# Altium PCB radxa_nx5_io_board_v1.4.PcbDoc (part 2 of 6)
Units mil, origin at the board's own origin, x right, y up, seen from the top; angles counter-clockwise.
Board outline 3937.73 x 3112.19 mil, 6 copper layers (Top, GND02, 内层3, Power4, 内层 5, Bottom), stack 58.1 mil thick; 363 components, 344 nets, 1618 pads, 1594 vias.
Unrouted connection lines stored in the file: 899.
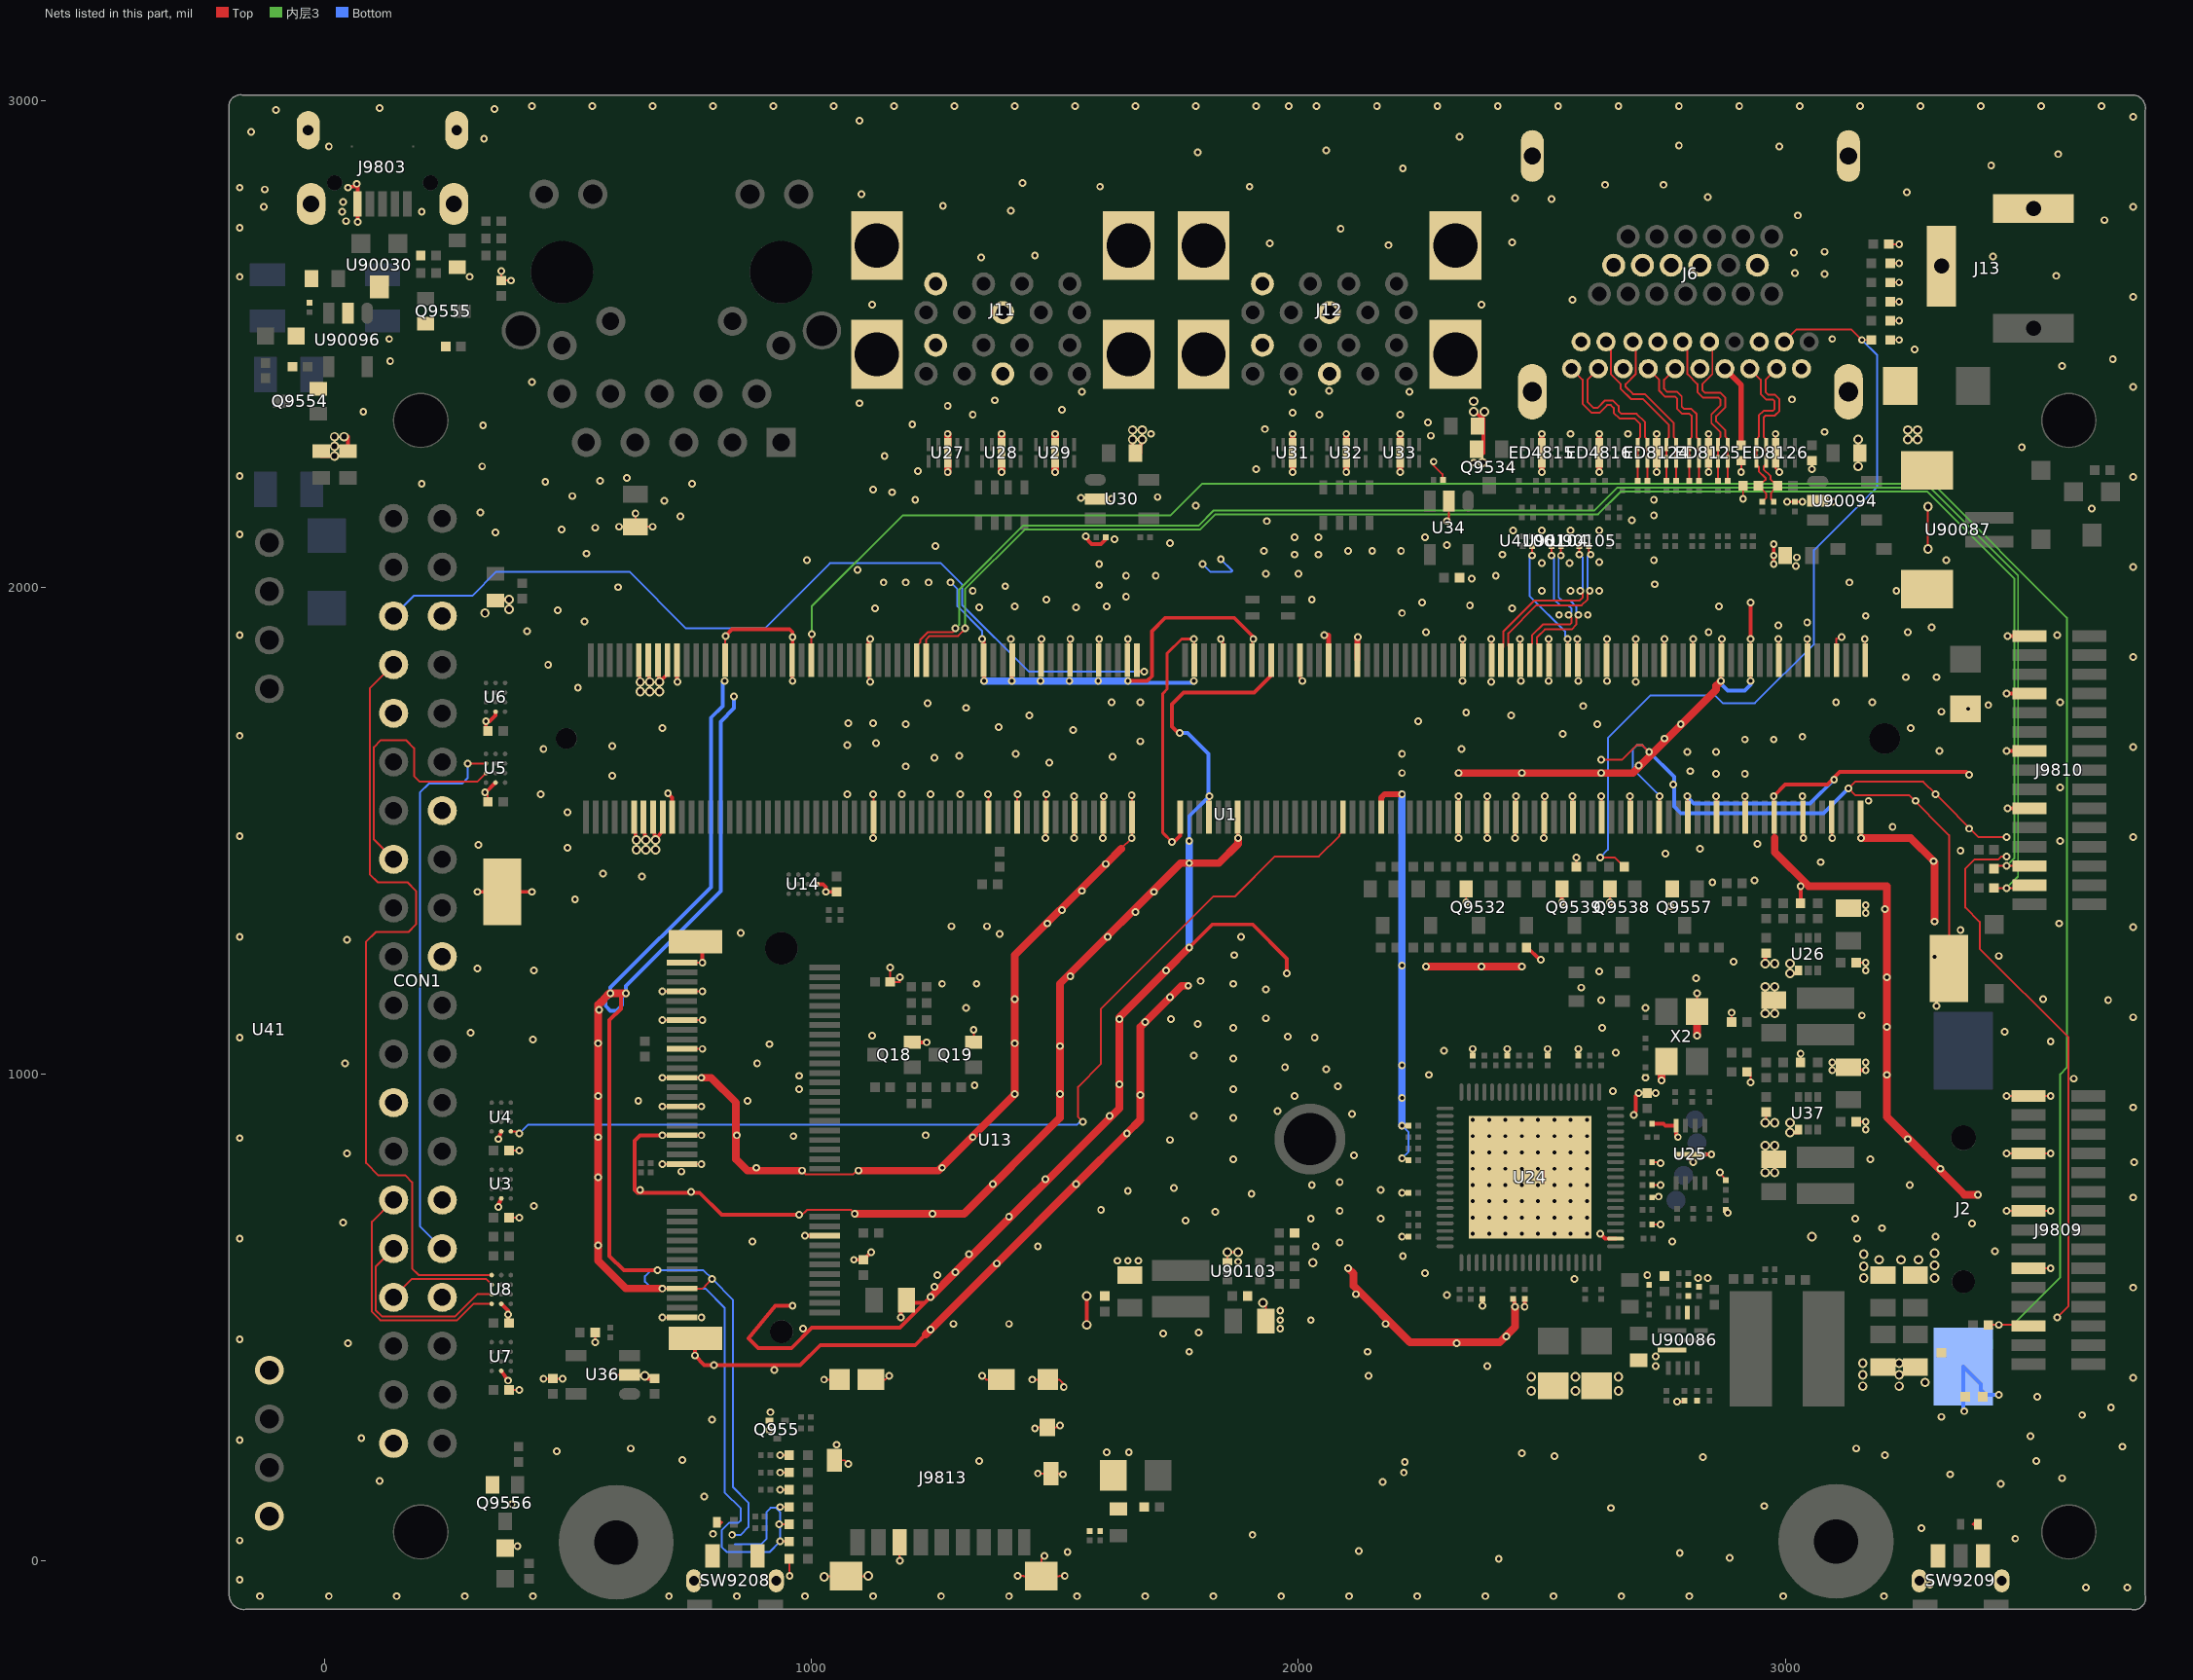
[diagram p5: the nets of this part, all layers, seen from the top]

## Via types
v1: diameter 15.75, hole 7.87, Top to Bottom, 1425 vias
v2: diameter 19.68, hole 11.81, Top to Bottom, 169 vias

## Nets (pads, with @x,y where several pads share a name; then routed paths per layer and width w, separated by ;. In a path a pad name is that pad's centre, name@x,y a point inside that pad or via, vN(x,y) a via of type N, cw(c..) or ccw(c..) an arc to the next point about the centre after c; other vN are vias at no path point) (continued)
BT_WAKE_HOST_H: J9810.3 R5.1 U1.189 | length 3202.5
  Top w3.94: U1.189@1235.24,1850.39 1235.24,1892.72 1242.13,1899.61 1301.04,1899.61 1315.88,1914.44 v1(1314.96,1915.35) ; R5.1@3429.13,1421.26 3429.13,1427.17 v1(3454.72,1427.17) J9810.3@3501.97,1427.17
  内层3 w3.94: v1(1314.96,1915.35) 1314.96,1995.87 1437.21,2118.11 1797.79,2118.11 1829.29,2149.61 2615.71,2149.61 2662.96,2196.85 3291.34,2196.85 3470.47,2017.72 3470.47,1442.91 v1(3454.72,1427.17)
CC_INT0_L: J9810.2 R6.1 U1.191 | length 3274.5
  Top w3.94: U1.191@1215.55,1850.39 1215.55,1878.94 1222.85,1886.23 1222.85,1891.46 1238.86,1907.48 1289.37,1907.48 1295.28,1913.39 v1(1295.28,1915.35) ; R6.1@3429.13,1381.89 v1(3454.72,1381.89) 3474.41,1381.89 3480.31,1387.8 J9810.2@3501.97,1387.8
  内层3 w3.94: v1(1295.28,1915.35) 1303.15,1923.23 1303.15,1995.19 1433.94,2125.98 1794.53,2125.98 1826.03,2157.48 2608.29,2157.48 2655.54,2204.72 3297.24,2204.72 3478.35,2023.62 3478.35,1405.51 v1(3454.72,1381.89)
CHRG_OK_H: CON1.5 U1.145 | length 1835
  Top w3.94: U1.145@1668.31,1850.39 1668.31,1832.68 1674.21,1826.77 v1(1683.07,1826.77)
  Bottom w3.94: CON1.5@140.94,1940.94 182.28,1982.28 302.47,1982.28 351.69,2031.5 625.98,2031.5 742.13,1915.35 903.54,1915.35 1037.4,2049.21 1265.55,2049.21 1309.06,2005.71 1309.06,1963.47 1445.76,1826.77 v1(1683.07,1826.77)
DDI0_HPD: ED8127.1 J6.D18 R95116.2 | length 1715.5
  Top w3.94: v1(2620.08,1444.88) 2649.61,1444.88 R95116.2@2669.29,1425.2 ; J6.D18@2998.03,2503.94 3023.62,2529.53 3135.83,2529.53 v1(3157.48,2507.87) ED8127.1@3177.21,2507.87
  Bottom w3.94: v1(2620.08,1444.88) 2635.83,1460.63 2635.83,1689.99 2723.4,1777.56 2855.71,1777.56 2871.45,1761.81 2937.6,1761.81 3059.06,1883.26 3059.06,2076.04 3188.98,2205.96 3188.98,2476.38 v1(3157.48,2507.87)
DDI_AUX_C_DN: C90486.1 ED8126.2 ED8126.9 J6.D17 R95120.2 | length 352.1
  Top w3.94: C90486.1@2976.38,2175.2 2970.47,2181.1 2970.47,2192.91 R95120.2@2984.25,2208.66 2982.28,2208.66 2969.49,2221.46 2969.49,2228.49 2955.71,2242.27 2955.71,2248.03 2960.63,2252.95 ED8126.2@2960.63,2258.37 ED8126.9@2960.63,2292.82 2960.63,2304.13 2955.71,2309.06 2955.71,2348.43 2959.65,2352.36 2978.35,2352.36 2988.19,2362.2 2988.19,2368.11 2988.19,2385.97 2978.49,2395.67 2964.57,2395.67 2959.65,2400.59 2959.65,2426.18 J6.D17@2982.28,2448.82
DDI_AUX_C_DP: C90485.1 ED8126.1 ED8126.10 J6.D15 R95119.2 | length 354.8
  Top w3.94: J6.D15@2927.17,2448.82 2949.8,2426.18 2949.8,2396.51 2960.49,2385.83 2974.41,2385.83 2978.35,2381.89 2978.35,2366.28 2974.4,2362.33 2955.7,2362.33 2945.87,2352.5 2945.87,2309.06 2940.94,2304.13 ED8126.10@2940.94,2292.82 ED8126.1@2940.94,2258.37 2940.94,2251.97 2945.87,2247.05 2945.87,2238.19 2959.65,2224.41 2959.65,2220.47 2947.83,2208.66 R95119.2@2944.88,2208.66 2960.63,2192.91 2960.63,2183.07 C90485.1@2952.76,2175.2
DDI_TX0_C_DN: C90479.2 ED8124.2 ED8124.9 J6.D3 | length 354.3
  Top w3.94: J6.D3@2616.14,2448.82 2593.5,2426.18 2593.5,2381.05 2606.44,2368.11 2614.17,2368.11 2629.92,2383.86 2645.67,2383.86 2657.48,2372.05 2657.48,2362.34 2663.53,2356.3 2694.88,2356.3 2711.61,2339.57 2711.61,2309.06 2716.54,2304.13 ED8124.9@2716.54,2292.82 ED8124.2@2716.54,2258.37 C90479.2@2716.54,2218.5
DDI_TX0_C_DP: C300.2 ED8124.1 ED8124.10 J6.D1 | length 354.3
  Top w3.94: J6.D1@2561.02,2448.82 2583.66,2426.18 2583.66,2376.97 2602.36,2358.27 2618.25,2358.27 2634,2374.02 2641.59,2374.02 2647.64,2367.97 2647.64,2358.27 2659.45,2346.46 2690.81,2346.46 2701.77,2335.49 2701.77,2308.07 2696.85,2303.15 ED8124.10@2696.85,2292.82 ED8124.1@2696.85,2258.37 C300.2@2696.85,2218.5
DDI_TX1_C_DN: C90477.2 ED8124.5 ED8124.6 J6.D6 | length 353.7
  Top w3.94: J6.D6@2687.01,2503.94 2692.91,2498.03 2692.91,2437.99 2672.24,2417.32 2672.24,2411.42 2687.01,2396.65 2711.75,2396.65 2770.67,2337.74 2770.67,2309.06 2775.59,2304.13 ED8124.6@2775.59,2292.82 ED8124.5@2775.59,2258.37 C90477.2@2775.59,2218.5
DDI_TX1_C_DP: C90478.2 ED8124.4 ED8124.7 J6.D4 | length 355.4
  Top w3.94: J6.D4@2631.89,2503.94 2641.73,2494.09 2641.73,2437.68 2662.4,2417.01 2662.4,2407.34 2682.93,2386.81 2707.68,2386.81 2760.83,2333.66 2760.83,2308.07 2755.91,2303.15 ED8124.7@2755.91,2292.82 ED8124.4@2755.91,2258.37 C90478.2@2755.91,2218.5
DDI_TX2_C_DN: C90527.2 ED8125.2 ED8125.9 J6.D9 | length 290.3
  Top w3.94: J6.D9@2773.62,2448.82 2750.98,2426.18 2750.98,2407.48 2756.89,2401.57 2777.56,2401.57 2787.4,2391.73 2787.4,2371.06 2792.32,2366.14 2807.23,2366.14 2817.91,2355.45 2817.91,2308.07 2822.83,2303.15 ED8125.9@2822.83,2292.82 ED8125.2@2822.83,2258.37 C90527.2@2822.83,2218.5
DDI_TX2_C_DP: C90476.2 ED8125.1 ED8125.10 J6.D7 | length 290.3
  Top w3.94: J6.D7@2718.5,2448.82 2741.14,2426.18 2741.14,2403.4 2752.81,2391.73 2773.48,2391.73 2777.56,2387.66 2777.56,2366.99 2788.25,2356.3 2803.15,2356.3 2808.07,2351.38 2808.07,2309.06 2803.15,2304.13 ED8125.10@2803.15,2292.82 ED8125.1@2803.15,2258.37 C90476.2@2803.15,2218.5
DDI_TX3_C_DN: C90473.2 ED8125.5 ED8125.6 J6.D12 | length 352.1
  Top w3.94: J6.D12@2844.49,2503.94 2850.39,2498.03 2850.39,2437.99 2829.72,2417.32 2829.72,2404.53 2834.65,2399.61 2866.28,2399.61 2876.97,2388.92 2876.97,2379.92 2876.97,2369.94 2858.27,2351.24 2858.27,2340.69 2876.97,2321.99 2876.97,2309.06 2881.89,2304.13 ED8125.6@2881.89,2292.82 ED8125.5@2881.89,2258.37 C90473.2@2881.89,2218.5
DDI_TX3_C_DP: C90526.2 ED8125.4 ED8125.7 J6.D10 | length 353.7
  Top w3.94: J6.D10@2789.37,2503.94 2799.21,2494.09 2799.21,2437.68 2819.88,2417.01 2819.88,2400.45 2830.57,2389.76 2862.2,2389.76 2867.13,2384.84 2867.13,2374.02 2848.43,2355.32 2848.43,2336.61 2867.13,2317.91 2867.13,2309.06 2862.2,2304.13 ED8125.7@2862.2,2292.82 ED8125.4@2862.2,2258.37 C90526.2@2862.2,2218.5
DP_MODE: J6.D13 R500.1 | length 171.3
  Top w11.81: J6.D13@2875.98,2448.82 2909.45,2415.35 R500.1@2909.45,2291.34
GAUGE_ALRT: J9809.3 R133.1 U1.213 | length 4519.6
  Top w3.94: U1.213@999.02,1850.39 999.02,1900.59 1000,1901.57 v1(1000,1903.54) ; R133.1@3417.32,484.25 v1(3438.98,484.25) 3500,484.25 J9809.3@3500,482.28
  内层3 w3.94: v1(1000,1903.54) 1000,1960.43 1187.21,2147.64 1737.51,2147.64 1802.47,2212.6 3303.15,2212.6 3578.74,1937.01 3578.74,1013.1 3564.96,999.32 3564.96,582 3467.21,484.25 v1(3438.98,484.25)
GND: C2.1 C3.1 C4.1 C5.1 C6.1 C7.2 C8.2 C9.2 C10.1 C53.1 C56.2 C57.2 C58.2 C63.1 C76.2 C81.2 C82.2 C83.2 C84.2 C85.2 C86.2 C87.2 C88.2 C89.2 C90.2 C91.2 C92.2 C93.2 C94.2 C95.2 C96.2 C97.2 C98.2 C99.2 C100.2 C101.2 C102.2 C103.2 C105.2 C106.2 C107.2 C108.2 C117.2 C118.2 C120.2 C121.2 C122.2 C123.2 C124.2 C90194.2 C90195.2 C90414.2 C90415.2 C90418.1 C90419.1 C90422.2 C90424.2 C90425.2 C90426.2 C90427.2 C90428.2 C90469.2 C90474.2 C90475.2 C90482.2 C90483.2 C90484.2 C90495.2 C90496.2 C90521.2 C90522.2 C90524.2 C90528.2 C90530.2 C90531.2 C90532.2 C90533.2 CON1.6 CON1.9 CON1.14 CON1.20 CON1.25 CON1.30 CON1.34 CON1.39 D6.2 D7.2 D8.2 D9.2 D10.2 D11.2 D12.2 D90007.1 ED4807.2 ED4815.3 ED4815.8 ED4816.3 ED4816.8 ED4817.2 ED4818.2 ED4819.2 ED4820.2 ED8124.3 ED8124.8 ED8125.3 ED8125.8 ED8126.3 ED8126.8 ED8127.2 ED8128.2 J2.2 J6.1 J6.2 J6.3 J6.4 J6.D2 J6.D5 J6.D8 J6.D11 J6.D16 J6.D19 J6.H2 J6.H5 J6.H8 J6.H11 J6.H17 J11.4 J11.7 J11.10 J11.11 J11.15 J11.18 J11.21 J11.22 J12.4 J12.7 J12.10 J12.11 J12.15 J12.18 J12.21 J12.22 J13.2 J13.3 J9803.5 J9803.6 J9803.7 J9803.8 J9803.9 J9809.6 J9809.9 J9809.12 J9809.15 J9810.6 J9810.9 J9810.12 J9810.15 J9813.6 J9813.10 J9813.11 J9813.12 J9813.13 J9813.14 J9813.15 J9813.16 J9813.17 J9813.D2 LED705.2 LED706.2 Q18.2 Q19.2 Q955.2 Q9532.2 Q9534.2 Q9538.2 Q9539.2 Q9554.2 Q9555.2 Q9556.2 Q9557.2 R78.1 R103.2 R112.2 R114.2 R116.2 R125.2 R127.2 R500.2 R95054.1 R95055.2 R95058.2 R95060.2 R95110.1 R95115.1 R95119.1 R95121.2 R95171.1 R95188.2 R95192.2 R95195.2 R95197.1 R95200.2 SW9208.1 SW9208.3 SW9208.4 SW9208.5 SW9209.1 SW9209.3 SW9209.4 SW9209.5 U1.1 U1.2 U1.7 U1.8 U1.13 U1.14 U1.19 U1.20 U1.25 U1.26 U1.31 U1.32 U1.37 U1.38 U1.43 U1.44 U1.49 U1.50 U1.55 U1.56 U1.61 U1.62 U1.67 U1.68 U1.73 U1.74 U1.79 U1.80 U1.85 U1.86 U1.102 U1.107 U1.113 U1.119 U1.125 U1.129 U1.132 U1.135 U1.138 U1.141 U1.144 U1.146 U1.147 U1.152 U1.153 U1.158 U1.159 U1.164 U1.165 U1.170 U1.171 U1.176 U1.177 U1.200 U1.201 U1.217 U1.231 U1.241 U1.242 U1.243 U1.244 U1.245 U1.246 U1.247 U1.248 U1.249 U1.250 U1.H3 U1.H4 U3.D2 U4.D2 U5.D2 U6.D2 U7.D2 U8.D2 U13.1 U13.7 U13.18 U13.33 U13.39 U13.45 U13.51 U13.57 U13.63 U13.69 U13.75 U13.76 U13.77 U14.D2 U24.40 U24.77 U25.4 U25.9 U26.1 U27.3 U27.8 U28.3 U28.8 U29.3 U29.8 U30.2 U31.3 U31.8 U32.3 U32.8 U33.3 U33.8 U34.2 U36.2 U37.1 U41.5 U41.8 U90030.3 U90086.2 U90086.10 U90087.3 U90087.4 U90094.2 U90096.2 U90103.1 X2.2 X2.4 | length 31064.2
  Top w3.94: v1@329.72,1577.76 334.65,1572.83 C4.1@334.65,1559.06 ; v1(362.2,2649.61) R78.1@362.2,2629.92 v1(381.89,2629.92) ; C6.1@377.95,350.39 v1(399.61,350.39) ; C2.1@377.95,704.72 v1(399.61,704.72) ; C3.1@377.95,842.52 v1(399.61,842.52) ; v1(448.82,374.02) C123.2@468.5,374.02 v1(488.19,374.02) ; v1(555.12,448.82) C124.2@555.12,468.5 ; v2(592.52,379.92) 594.49,381.89 U36.2@625.98,381.89 655.51,381.89 v2(657.48,379.92) ; v1(637.8,2151.57) C63.1@637.8,2124.02 v1(673.23,2124.02) ; v1(692.91,500) U13.1@733.27,500 ; v1(692.91,559.06) U13.7@733.27,559.06 773.62,559.06 774.53,558.15 781.23,564.24 781.3,564.96 789.37,573.03 789.37,573.37 v1(795.28,578.74) ; v1(692.91,814.96) U13.33@733.27,814.96 v1(773.62,814.96) ; v1(692.91,874.02) U13.39@733.27,874.02 v1(773.62,874.02) ; v1(692.91,933.07) U13.45@733.27,933.07 v1(773.62,933.07) ; v1(692.91,992.13) U13.51@733.27,992.13 v1(773.62,992.13) ; v1(692.91,1110.24) U13.63@733.27,1110.24 v1(775.59,1110.24) ; v1(692.91,1169.29) U13.69@733.27,1169.29 v1(775.59,1169.29) ; U13.57@733.27,1051.18 v1(775.59,1051.18) ; U13.75@733.27,1228.35 v1(775.59,1228.35) ; U1.231@821.85,1850.39 821.85,1904.53 v1(822.83,1899.61) ; Q955.2@913.19,287.4 913.19,278.53 913.39,278.33 v1(913.39,267.72) ; v1(933.07,74.8) D9.2@953.59,74.8 ; v1(935.04,39.37) D8.2@953.59,39.37 ; v1(935.04,110.24) D10.2@953.59,110.24 ; v1(935.04,145.67) D11.2@953.59,145.67 ; v1(935.04,181.1) D12.2@953.59,181.1 ; v1(935.04,216.54) D6.2@953.59,216.54 ; D7.2@953.59,3.94 v1(954.72,-31.5) ; v1(974.41,710.63) 977.36,707.68 990.16,720.47 1080.71,720.47 v1(1088.58,712.6) ; v1(980.32,801.18) 988.19,793.31 1084.65,793.31 1094.49,803.15 v1(1096.46,801.18) ; v2(1025.59,-33.46) 1027.09,-31.97 J9813.16@1070.37,-31.97 1106.81,-31.97 1107.28,-31.5 v2(1116.14,-31.5) ; v1(1025.59,372.05) J9813.14@1057.09,372.05 ; J9813.15@1046.75,206.2 1067.42,206.2 v1(1074.8,198.82) ; U1.201@1117.13,1850.39 1117.13,1808.07 v1(1120.08,1805.12) ; J9813.13@1121.56,372.05 1151.57,372.05 v1(1159.45,379.92) ; v1(1125.98,1484.25) 1126.97,1485.24 U1.200@1126.97,1527.56 1126.97,1573.82 v1(1125.98,1574.8) ; v1(1161.42,1218.5) 1159.52,1218.13 1161.42,1208.66 C57.2@1161.42,1188.98 1181.1,1188.98 v1(1181.1,1198.82) ; J9813.6@1180.61,37.7 1180.61,8.15 1181.1,7.66 v1(1181.1,0) ; Q19.2@1332.68,1064.96 v1(1332.68,1090.55) ; v1(1350.39,379.92) 1358.27,372.05 J9813.12@1389.27,372.05 ; v1(1362.2,1574.8) 1362.2,1570.87 1363.19,1569.88 U1.176@1363.19,1527.56 ; U1.170@1422.24,1527.56 1422.24,1573.82 v1(1423.23,1574.8) ; v1(1423.23,-31.5) 1435.04,-31.5 1435.52,-31.97 J9813.17@1471.95,-31.97 ; v1(1452.76,372.05) J9813.11@1485.24,372.05 1508.37,372.05 1517.72,362.7 v1(1517.72,356.3) ; v1(1458.66,271.65) 1460.63,273.62 J9813.D2@1484.25,273.62 1505.91,273.62 v1(1509.84,277.56) ; v1(1464.57,179.13) 1472.92,179.13 1473.41,178.64 J9813.10@1491.63,178.64 1514.27,178.64 v1(1515.75,177.17) ; U1.165@1471.46,1850.39 1471.46,1892.72 v1(1472.44,1893.7) ; v1(1478.35,9.84) 1471.95,3.44 J9813.17@1471.95,-31.97 ; v1(1480.32,1484.25) 1481.3,1485.24 U1.164@1481.3,1527.56 1481.3,1573.82 v1(1482.28,1574.8) ; v1(1519.69,-31.5) 1508.85,-31.5 1508.38,-31.97 J9813.17@1471.95,-31.97 ; U1.159@1530.51,1850.39 1530.51,1892.72 v1(1531.5,1893.7) ; v1(1539.37,1484.25) 1540.35,1485.24 U1.158@1540.35,1527.56 1540.35,1569.88 v1(1539.37,1570.87) ; U1.153@1589.57,1850.39 1589.57,1892.72 v1(1590.55,1893.7) ; v1(1598.43,1484.25) 1599.41,1485.24 U1.152@1599.41,1527.56 1599.41,1569.88 v1(1600.39,1570.87) ; 1635.83,1462.6 v1(1657.48,1484.25) 1658.46,1485.24 U1.146@1658.46,1527.56 1658.46,1571.85 v1(1657.48,1572.83) ; U1.147@1648.62,1850.39 1648.62,1892.72 v1(1649.61,1893.7) ; v1(1785.43,1893.7) 1786.42,1892.72 U1.141@1786.42,1850.39 ; U1.138@1815.94,1527.56 1815.94,1569.88 v1(1816.93,1570.87) ; v1(1840.55,1893.7) 1844.49,1893.7 1845.47,1892.72 U1.135@1845.47,1850.39 ; U90103.1@1854.33,614.17 v2(1854.33,633.86) v2(1875.98,633.86) ; U1.132@1875,1527.56 1875,1485.24 v1(1875.98,1484.25) ; U1.129@1904.53,1850.39 1904.53,1892.72 1905.51,1893.7 v1(1907.48,1893.7) ; v2(1927.17,529.53) 1933.07,529.53 C90530.2@1933.07,492.13 ; U1.119@2002.95,1850.39 2002.95,1808.07 v1(2007.87,1807.09) ; v1(2212.6,665.35) C99.2@2226.38,665.35 ; v1(2212.6,755.91) C88.2@2226.38,755.91 ; v1(2212.6,826.77) 2222.44,826.77 C98.2@2226.38,822.83 ; v1(2212.6,893.7) C93.2@2226.38,893.7 ; v1(2277.56,2257.87) 2275.35,2256.22 2275.59,2255.98 2275.59,2251.97 2295.28,2232.28 2296.18,2232.28 2296.18,2227.44 2297.24,2226.38 R116.2@2297.24,2220.47 ; v1(2305.12,2135.83) 2309.06,2135.83 U34.2@2309.06,2177.17 ; v1(2328.74,1484.25) 2327.76,1485.24 U1.86@2327.76,1527.56 2328.74,1527.56 v1(2328.74,1570.87) ; v1(2336.61,1893.7) 2337.6,1892.72 U1.85@2337.6,1850.39 ; v1(2344.49,1352.36) Q9532.2@2344.49,1379.92 ; C86.2@2358.27,1037.4 v1(2358.27,1051.18) ; v1(2387.8,1484.25) 2386.81,1485.24 U1.80@2386.81,1527.56 2386.81,1569.88 v1(2387.8,1570.87) ; v1(2395.67,1893.7) 2395.67,1894.69 2396.65,1893.7 U1.79@2396.65,1850.39 ; C97.2@2429.13,1037.4 v1(2429.13,1051.18) ; v1(2444.88,1484.25) 2445.87,1485.24 U1.74@2445.87,1527.56 2445.87,1569.88 v1(2446.85,1570.87) ; v1(2454.72,1893.7) 2455.71,1892.72 U1.73@2455.71,1850.39 ; v1(2503.94,1484.25) 2504.92,1485.24 U1.68@2504.92,1527.56 2504.92,1569.88 v1(2505.91,1570.87) ; C87.2@2511.81,1037.4 v1(2511.81,1051.18) ; v1(2513.78,1893.7) 2513.78,1850.39 U1.67@2514.76,1850.39 ; v1(2562.99,1570.87) 2563.98,1569.88 U1.62@2563.98,1527.56 ; R95115.1@2570.87,1425.2 v1(2570.87,1444.88) ; v1(2572.83,1893.7) 2572.83,1850.39 U1.61@2573.82,1850.39 ; C96.2@2574.8,1037.4 v1(2574.8,1051.18) ; v1(2618.11,2236.22) 2617.13,2236.22 v1@2618.11,2237.2 ; v1@2618.11,2313.98 2617.13,2314.96 v1(2618.11,2314.96) ; v1(2622.05,1570.87) 2623.03,1569.88 U1.56@2623.03,1527.56 ; v1(2622.05,1645.67) 2665.35,1645.67 2694.88,1675.2 2706.69,1675.2 v1(2720.47,1661.42) ; U1.55@2632.87,1850.39 2632.87,1894.69 v1(2633.86,1893.7) ; v1(2639.76,1352.36) Q9538.2@2639.76,1379.92 ; v1(2681.1,1570.87) 2682.09,1569.88 U1.50@2682.09,1527.56 ; U1.49@2691.93,1850.39 2691.93,1894.69 v1(2692.91,1893.7) ; v1(2698.82,960.63) C90.2@2716.54,960.63 v1(2734.25,960.63) ; C101.2@2726.38,690.94 v1(2744.09,690.94) ; R103.2@2726.38,746.06 2724.41,748.03 v1(2740.16,748.03) ; C95.2@2726.38,771.65 v1(2744.09,771.65) ; C76.2@2726.38,818.9 2744.09,818.9 v1(2744.09,816.93) ; v1(2736.22,2236.22) ED8124.3@2736.22,2260.33 ; ED8124.8@2736.22,2290.85 v1(2736.22,2314.96) ; U1.44@2741.14,1527.56 2741.14,1569.88 v1(2742.13,1570.87) ; U1.43@2750.98,1850.39 2750.98,1893.7 v1(2751.97,1893.7) ; v1(2777.56,326.77) 2793.31,326.77 C90425.2@2793.31,328.74 ; v1(2799.21,1570.87) 2800.2,1569.88 U1.38@2800.2,1527.56 ; U1.37@2810.04,1850.39 2810.04,1893.7 2811.02,1894.69 v1(2811.02,1893.7) ; X2.4@2818.9,1127.95 v1(2818.9,1165.35) ; v1(2842.52,2236.22) ED8125.3@2842.52,2260.33 ; ED8125.8@2842.52,2290.85 v1(2842.52,2314.96) ; v1(2858.27,1570.87) 2859.25,1569.88 U1.32@2859.25,1527.56 ; v1(2866.14,797.24) C82.2@2877.95,781.5 ; v1(2868.11,1807.09) 2868.11,1850.39 U1.31@2869.09,1850.39 2869.09,1894.69 v1(2870.08,1893.7) ; C81.2@2877.95,720.47 v1(2881.89,714.57) ; C91.2@2889.76,1106.3 v1(2889.76,1125.98) ; v1(2909.45,2236.22) R500.2@2909.45,2259.84 ; v1(2913.39,2181.1) 2912.83,2181.14 2913.39,2188.98 R95119.1@2913.39,2208.66 ; v1(2917.32,1570.87) 2917.32,1571.85 2918.31,1570.87 U1.26@2918.31,1527.56 ; C92.2@2921.26,1003.94 2929.13,1003.94 v1(2929.13,982.28) ; U1.25@2928.15,1850.39 U1.25@2929.13,1850.39 ; v1(2929.13,1807.09) U1.25@2929.13,1850.39 ; v1(2929.13,1893.7) U1.25@2929.13,1850.39 ; v2(2958.66,899.61) 2960.63,901.57 C121.2@2960.63,921.26 ; v1(2976.38,1570.87) 2977.36,1569.88 U1.20@2977.36,1527.56 2977.36,1484.25 2978.35,1484.25 ; ED8126.3@2980.32,2260.33 2980.32,2244.09 v1(2988.19,2236.22) ; ED8126.8@2980.32,2290.85 2980.32,2313.98 2979.33,2314.96 v1(2980.32,2314.96) ; v1(2986.22,1893.7) 2986.22,1894.69 2987.2,1893.7 U1.19@2987.2,1850.39 ; v1(3003.94,2175.2) R95121.2@3019.69,2175.2 v1(3035.43,2175.2) ; R125.2@3031.5,1023.62 v1(3031.5,1041.34) ; U1.14@3036.42,1527.56 3036.42,1484.25 v1(3037.4,1484.25) ; v1(3045.28,1893.7) 3046.26,1892.72 U1.13@3046.26,1850.39 ; v1(3055.12,2242.13) C90482.2@3055.12,2259.84 ; U90094.2@3066.93,2177.17 3096.46,2177.17 v1(3098.43,2175.2) ; U1.8@3095.47,1527.56 3095.47,1484.25 v1(3096.46,1484.25) ; U1.7@3105.32,1850.39 3105.32,1894.69 3106.3,1893.7 v1(3116.14,1897.64) ; C118.2@3145.67,901.57 v1(3165.35,901.57) ; C103.2@3145.67,1228.35 v1(3165.35,1228.35) ; v2(3149.61,2248.03) 3149.61,2275.59 C90483.2@3153.54,2275.59 ; U1.2@3154.53,1527.56 3154.53,1485.24 v1(3155.51,1484.25) ; v1(3163.39,1893.7) 3163.39,1894.69 3164.37,1893.7 U1.1@3164.37,1850.39 ; C90469.2@3212.6,2704.72 v1(3234.25,2704.72) ; ED8127.2@3215.7,2507.87 v1(3234.25,2507.87) ; ED4820.2@3215.7,2547.24 v1(3234.25,2547.24) ; ED4819.2@3215.7,2586.61 v1(3234.25,2586.61) ; ED4817.2@3215.7,2625.98 v1(3234.25,2625.98) ; ED4818.2@3215.7,2665.35 v1(3234.25,2665.35) ; v2(3293.31,2078.74) v2(3293.31,2165.35) ; U1.H4@3336.61,1216.54 3336.61,1490.16 3253.94,1572.83 3143.7,1572.83 v1(3129.92,1586.61) 3143.7,1600.39 3283.46,1600.39 v1(3309.06,1574.8) 3397.64,1486.22 v1(3454.72,1486.22) ; v1(3454.72,718.5) J9809.9@3500,718.5 v1(3545.28,718.5) ; v1(3454.72,836.61) J9809.12@3500,836.61 3543.31,836.61 3544.29,837.6 v1(3545.28,836.61) ; v1(3454.72,954.72) J9809.15@3500,954.72 v1(3545.28,954.72) ; v1(3454.72,1446.85) 3444.14,1446.85 3438.23,1440.94 3389.29,1440.94 3370.08,1421.74 3370.08,1341.84 3399.61,1312.32 3399.61,1257.2 3582.19,1074.62 3582.19,523.13 v1(3559.06,500) ; J9809.6@3500,600.39 v1(3545.28,600.39)
  Top w5.91: v1(1740.16,1476.38) 1721.46,1495.08 1721.46,1781.5 1730.32,1790.35 1730.32,1864.07 1759.94,1893.7 v1(1785.43,1893.7)
  Top w7.87: C8.2@-7.87,2279.53 -7.87,2269.69 v2(19.69,2269.69) ; v2(39.37,2309.06) 47.24,2309.06 C7.2@47.24,2279.53 ; v1(47.24,2820.87) 49.21,2822.83 v1@66.93,2822.83 ; v1(64.96,2828.74) v1@66.93,2822.83 ; v1(312.99,1374.02) U1.H3@364.17,1374.02 v1(425.2,1374.02) ; v1(328.74,1578.74) 329.72,1577.76 U5.D2@350.39,1598.43 ; C5.1@334.65,1704.72 330.71,1704.72 v1(330.71,1724.41) 338.58,1724.41 350.39,1736.22 U6.D2@350.39,1744.09 ; C9.2@350.39,1972.44 350.39,1974.41 v2(377.95,1974.41) ; v1(356.3,726.38) 356.3,730.32 U3.D2@362.2,744.09 ; v1(356.3,866.14) U4.D2@362.2,881.89 ; U7.D2@362.2,389.76 v1(375.98,370.08) ; U8.D2@362.2,527.56 375.98,513.78 v1(375.98,505.91) 375.98,488.19 C10.1@377.95,488.19 ; v1@616.14,1165.35 608.27,1157.48 608.27,1133.86 584.65,1110.24 584.65,626.04 614.23,596.46 v1(683.07,596.46) ; U1.250@634.84,1527.56 634.84,1508.2 v2(639.76,1480.32) ; U1.249@644.69,1850.39 644.69,1849.41 v2(647.64,1805.12) ; v1(647.64,761.81) 647.64,755.91 641.73,755.91 ; U1.248@654.53,1527.56 654.53,1508.2 v2(659.45,1480.32) ; v2(657.48,379.92) 663.39,374.02 C122.2@677.17,374.02 ; U1.247@664.37,1850.39 664.37,1849.41 v2(667.32,1805.12) ; U1.246@674.21,1527.56 674.21,1508.2 v2(679.13,1480.32) 693.9,1499.62 U1.244@693.9,1527.56 ; U1.245@684.06,1850.39 684.06,1849.41 v2(687.01,1805.12) 703.74,1821.85 U1.243@703.74,1850.39 ; v1(692.91,874.02) 647.64,874.02 635.83,862.2 635.83,761.81 641.73,755.91 ; v1(704.72,1576.77) 713.58,1567.91 U1.242@713.58,1527.56 ; U1.241@723.43,1850.39 723.43,1804.13 v1(724.41,1805.12) ; v1(751.97,757.87) v1@751.97,755.91 ; U13.77@760.83,456.69 759.84,456.69 v1(759.84,421.26) 779.53,401.57 v1(799.21,401.57) 976.3,401.57 1017.63,442.91 1212.6,442.91 1234.25,464.57 ; U13.76@760.83,1271.65 775.59,1271.65 v1(775.59,1228.35) ; v1(822.83,1899.61) 836.61,1913.39 954.72,1913.39 960.63,1907.48 v1(960.63,1897.64) 960.63,1850.39 U1.217@959.65,1850.39 959.65,1808.07 v1(960.63,1807.09) ; v1(960.63,523.62) 925.2,523.62 870.08,456.69 889.76,437.01 958.66,437.01 1000,478.35 1181.1,478.35 v1(1244.09,541.34) 1232.28,529.53 1194.88,529.53 C58.2@1194.88,535.43 1183.07,535.43 v1(1183.07,500) ; v1(974.41,710.63) 814.96,710.63 769.69,755.91 ; v1(986.22,667.32) U13.18@1026.58,667.32 ; U14.D2@1011.81,1389.76 1023.62,1389.76 1029.53,1383.86 v1(1029.53,1374.02) C53.1@1051.18,1374.02 ; v1(1086.61,618.11) C56.2@1106.3,618.11 v1(1122.05,633.86) ; U1.201@1117.13,1850.39 1117.13,1890.75 v1(1120.08,1893.7) ; Q18.2@1206.69,1064.96 v1(1236.22,1064.96) ; v1(1350.39,1893.7) 1353.35,1890.75 U1.177@1353.35,1850.39 1354.33,1850.39 v1(1354.33,1807.09) ; v1(1411.42,1807.09) 1411.42,1850.39 U1.171@1412.4,1850.39 ; v1(1562.99,2104.33) 1562.99,2101.07 1575.48,2088.58 1593.81,2088.58 1605.96,2100.73 1604.33,2100.73 R114.2@1604.33,2102.36 ; v2(1564.96,484.25) v2(1564.96,543.31) ; U30.2@1582.68,2181.1 v1(1616.14,2181.1) ; v1(1649.61,1807.09) 1688.98,1807.09 1698.82,1816.93 1698.82,1909.45 1726.38,1937.01 1868.11,1937.01 1907.48,1897.64 v1(1907.48,1893.7) ; v2(1659.45,2303.15) 1659.45,2275.59 C107.2@1665.35,2275.59 1675.2,2275.59 1675.2,2289.37 v2(1679.13,2303.15) ; v1(1740.16,1476.38) 1742.13,1474.41 1756.89,1489.17 U1.144@1756.89,1527.56 ; v1(1755.91,1700.79) 1754.41,1699.3 1740.16,1713.55 1740.16,1759.84 1763.78,1783.46 1909.11,1783.46 1945.7,1820.05 1945.7,1850.39 U1.125@1943.9,1850.39 ; v1(1775.59,1259.84) 1822.83,1307.09 1906.13,1307.09 1976.38,1236.84 v1(1976.38,1206.69) ; v2(2360.24,2360.24) 2379.92,2346.46 2379.92,2275.59 Q9534.2@2370.08,2275.59 ; v1(2377.95,523.62) C100.2@2377.95,537.4 ; C89.2@2440.94,537.4 2442.91,537.4 2442.91,535.43 v1(2444.88,521.65) ; v1(2464.57,521.65) C94.2@2464.57,537.4 ; R95110.1@2468.5,1259.84 2468.5,1260.83 2469.49,1260.83 2497.05,1233.27 v1(2498.03,1234.25) ; v1(2541.34,1352.36) Q9539.2@2541.34,1379.92 ; v1(2620.08,671.26) 2629.92,661.42 U24.40@2651.57,661.42 ; v1(2688.98,915.35) 2692.22,915.16 2692.91,926.98 2692.91,954.72 v1(2698.82,960.63) ; C85.2@2726.38,897.64 2749.51,897.64 2753.44,893.7 U25.4@2775.59,893.7 2775.59,870.08 v1(2779.53,870.08) ; v1(2811.02,818.9) 2805.12,824.8 U25.9@2805.12,834.65 v1(2848.43,834.65) ; v1(2929.13,1893.7) v1(2929.13,1968.5) ; v2(2958.66,1226.38) 2958.66,1248.03 C106.2@2960.63,1248.03 ; C120.2@2976.38,824.8 2978.35,824.8 v2(2978.35,797.24) ; C105.2@2976.38,1151.57 2978.35,1151.57 v2(2978.35,1124.02) ; v1(2976.38,1570.87) 3000,1594.49 3086.61,1594.49 3112.2,1620.08 3372.05,1620.08 v1(3377.95,1614.17) ; v1(2976.38,2047.24) v1(2976.38,2064.96) v1(2976.38,2088.58) ; v2(3009.84,879.92) 3027.56,879.92 U37.1@3027.56,885.83 ; v2(3009.84,1206.69) 3027.56,1206.69 U26.1@3027.56,1212.6 ; R112.2@3031.5,1350.39 v1(3031.5,1385.83) ; C117.2@3129.92,1013.78 3129.92,1007.87 v1(3165.35,1007.87) ; v1(3454.72,1663.39) J9810.9@3501.97,1663.39 ; v1(3454.72,1781.5) J9810.12@3501.97,1781.5 ; v1(3456.69,1545.28) J9810.6@3501.97,1545.28 ; v1(3456.69,1899.61) J9810.15@3501.97,1899.61 ; v1@66.93,2822.83 v1(66.93,2750) J9803.5@66.93,2787.4 v1@66.93,2822.83 ; 641.73,755.91 v1@751.97,755.91 ; 641.73,755.91 769.69,755.91 ; v1@751.97,755.91 769.69,755.91
  Top w9.84: v1(2053.15,1901.57) 2062.01,1901.57 U1.113@2062.01,1850.39
  Top w11.81: v1(1988.19,2236.22) U31.8@1988.19,2260.33 ; U31.3@1988.19,2290.85 v1(1988.19,2314.96) ; v1(2098.43,2236.22) U32.3@2098.43,2260.33 ; U32.8@2098.43,2290.85 v1(2098.43,2314.96) ; U1.107@2121.06,1850.39 2121.06,1896.65 v1(2122.05,1897.64) ; U1.102@2170.28,1527.56 2170.28,1567.91 2177.17,1574.8 v1(2212.6,1574.8) ; v1(2208.66,2236.22) U33.3@2208.66,2260.33 ; U33.8@2208.66,2290.85 v1(2208.66,2314.96) ; v1(2500,2236.22) ED4815.3@2500,2260.33 ; ED4815.8@2500,2290.85 v1(2500,2314.96) ; v1@2618.11,2237.2 ED4816.3@2618.11,2260.33 ; ED4816.8@2618.11,2290.85 v1@2618.11,2313.98
  Top w15.75: v1(618.11,1165.35) 616.14,1165.35 v1(586.61,1165.35) 584.37,1165.35 572.83,1153.82 572.83,1151.57 568.9,1147.64 567.63,1148.9 561.02,1142.29 561.02,616.26 618.23,559.06 v1(692.91,559.06) ; v1(773.62,992.13) 793.31,992.13 844.49,940.94 844.49,824.8 868.11,801.18 v1(980.32,801.18) ; v1(1088.58,712.6) 1312.99,712.6 1509.84,909.45 v1(1509.84,958.66) v1(1509.84,1057.09) 1509.84,1185.04 1757.87,1433.07 v1(1775.59,1433.07) 1836.61,1433.07 1875.98,1472.44 v1(1875.98,1484.25) ; v1(1096.46,801.18) 1260.26,801.18 1417.32,958.24 v1(1417.32,958.66) v1(1417.32,1062.99) v1(1417.32,1153.54) 1417.32,1244.09 v1(1604.33,1431.1) 1635.83,1462.6 ; 1234.25,464.57 v1(1244.09,474.41) v1(1379.92,610.24) v1(1543.31,773.62) v1(1647.64,877.95) 1675.2,905.51 v1(1675.2,956.69) 1675.2,1096.26 1760.04,1181.1 v1(1773.62,1181.1) ; v1(1244.09,541.34) v1(1295.28,592.52) 1631.89,929.13 v1(1631.89,978.35) v1(1631.89,1112.2) 1631.89,1116.14 v1(1728.35,1212.6) v1(1775.59,1259.84) ; v1(1279.53,2236.22) U27.8@1279.53,2260.33 ; U27.3@1279.53,2290.85 v1(1279.53,2314.96) ; v1(1389.76,2236.22) U28.3@1389.76,2260.33 ; U28.8@1389.76,2290.85 v1(1389.76,2314.96) ; v1(1500,2236.22) U29.3@1500,2260.33 ; U29.8@1500,2290.85 v1(1500,2314.96) ; v1(2102.36,600.39) 2112.82,589.93 2112.82,564.96 2228.96,448.82 2413.39,448.82 2444.88,480.32 v1(2444.88,521.65) ; v1(2261.81,1220.47) v1(2458.66,1220.47) ; v1(2328.74,1618.11) 2687.01,1618.11 2858.27,1789.37 2858.27,1797.24 v1(2868.11,1807.09) ; v1(2746.06,986.22) 2746.06,1025.59 X2.2@2755.91,1025.59 ; v1(2818.9,1078.74) X2.4@2818.9,1127.95 ; 2978.35,1484.25 2978.35,1455.71 3048.23,1385.83 3208.66,1385.83 v1(3208.66,1198.82) v1(3208.66,1096.46) v1(3208.66,998.03) 3208.66,911.42 3368.11,751.97 v1(3395.67,751.97) ; v1(3155.51,1484.25) 3257.87,1484.25 v1(3305.12,1437.01) 3307.09,1435.04 v1(3307.09,1312.99)
  Bottom w3.94: v1(836.61,53.15) 854.33,53.15 870.08,68.9 870.08,119.18 838.58,150.68 838.58,535.43 v1(795.28,578.74) 777.56,596.46 v1(683.07,596.46) 669.49,596.46 657.48,584.45 657.48,573.03 671.46,559.06 v1(692.91,559.06) 781.5,559.06 820.87,519.69 820.87,140.24 854.33,106.78 854.33,82.68 849.52,77.87 830.71,77.87 814.96,62.12 814.96,28.23 825.48,17.72 913.39,17.72 v1(935.04,39.37) 935.04,100.2 926.97,108.27 915.55,108.27 907.48,100.2 907.48,45.47 895.47,33.46 842.52,33.46 ; v1(1285.43,2009.84) 1299.21,1996.06 1299.21,1960.63 1350.39,1909.45 v1(1350.39,1893.7) ; v1(1803.15,2047.24) 1818.9,2031.5 1862.2,2031.5 1864.17,2033.46 v1(1840.55,2057.09) ; v1(2212.6,826.77) 2226.38,840.55 2226.38,879.92 v1(2212.6,893.7) ; v1(2720.47,1661.42) 2706.69,1675.2 2695.08,1675.2 2687.01,1667.12 2687.01,1625.98 v1(2742.13,1570.87)
  Bottom w7.87: v1(820.87,1807.09) 816.93,1803.15 816.93,1755.59 793.31,1731.97 793.31,1383.86 586.61,1177.17 v1(586.61,1165.35) 580.81,1156.23 576.77,1152.19 576.77,1139.15 586,1129.92 599.04,1129.92 610.24,1141.11 610.24,1157.48 v1(618.11,1165.35) 618.11,1180.82 812.99,1375.7 812.99,1723.82 840.55,1751.38 v1(840.55,1775.59) ; v1(1649.61,1807.09) 1653.54,1803.15 1785.43,1803.15 v1(1785.43,1807.09) ; v1(1755.91,1700.79) 1771.65,1700.79 1814.96,1657.48 1814.96,1570.87 v1(1816.93,1570.87) 1775.59,1529.53 v1(1775.59,1478.35) ; v1(2720.47,1661.42) 2771.65,1610.24 2771.65,1549.27 2785.49,1535.43 3078.74,1535.43 v1(3129.92,1586.61) ; v1(2799.21,1570.87) 2797.72,1569.38 2811.98,1555.12 3051.18,1555.12 v1(3100.39,1604.33) ; v1(2868.11,1807.09) 2868.11,1801.35 2882.05,1787.4 2917.32,1787.4 2929.13,1799.21 v1(2929.13,1807.09) ; v1(3368.11,307.09) 3366.14,309.06 J2.2@3366.14,398.26 3401.57,362.83 3401.57,350.39 3411.42,340.55 v1(3438.98,340.55)
  Bottom w15.75: v1(1354.33,1807.09) v1(1649.61,1807.09) ; v1(1775.59,1259.84) v1(1775.59,1478.35) ; v1(2212.6,893.7) v1(2212.6,1574.8)
  other v1: -133.86,-72.83 7.87,-72.83 147.64,-72.83 287.4,-72.83 427.17,-72.83 706.69,-72.83 846.46,-72.83 986.22,-72.83 1125.98,-72.83 1265.75,-72.83 1405.51,-72.83 1545.28,-72.83 1685.04,-72.83 1824.8,-72.83 1964.57,-72.83 2104.33,-72.83 2244.09,-72.83 2383.86,-72.83 2523.62,-72.83 2663.39,-72.83 2803.15,-72.83 2996.06,-72.83 3202.76,-72.83 3618.11,-55.12 3702.76,-55.12 3297.24,-49.21 -175.2,-39.37 2411.42,3.94 2885.83,5.91 2783.46,15.75 1525.59,17.72 2124.02,19.69 395.67,29.53 -175.2,41.34 3472.44,45.28 1905.51,53.15 797.24,55.12 3279.53,66.93 2641.73,108.27 2956.69,112.2 383.86,116.14 779.53,131.89 3442.91,157.48 2173.23,161.42 112.2,163.39 3568.9,169.29 3338.58,177.17 2216.54,181.1 2218.5,202.76 1344.49,204.72 3515.75,204.72 734.25,206.69 2830.71,212.6 2525.59,214.57 3204.72,216.54 2458.66,220.47 1606.3,222.44 1651.57,222.44 476.38,224.41 627.95,230.32 3145.67,230.32 3692.91,234.25 1051.18,238.19 -175.2,248.03 74.8,251.97 3503.94,255.91 795.28,289.37 3320.87,295.28 3610.24,299.21 915.35,305.12 3669.29,314.96 3517.72,336.61 3714.57,375.98 2143.7,379.92 923.23,391.73 2387.8,399.61 2734.25,399.61 2734.25,419.29 1775.59,429.13 2141.73,429.13 47.24,446.85 2324.8,446.85 -175.2,454.72 2427.17,460.63 1722.44,466.54 1795.28,468.5 982.28,476.38 1962.6,476.38 1291.34,486.22 1405.51,486.22 2179.13,486.22 1962.6,494.09 2025.59,494.09 773.62,500 1962.6,513.78 2305.12,545.28 2118.11,547.24 3714.57,561.02 1251.97,562.99 2566.93,578.74 2820.87,580.71 2840.55,580.71 1257.87,586.61 2716.54,586.61 2259.84,590.55 1875.98,614.17 1627.95,616.14 1649.61,616.14 1671.26,616.14 2214.57,625.98 1322.83,629.92 3431.1,635.83 1464.57,645.67 2035.43,645.67 561.02,647.64 2084.65,653.54 877.95,655.51 2767.72,655.51 -175.2,661.42 3147.64,661.42 3309.06,665.35 2358.27,671.26 2391.73,671.26 2425.2,671.26 2458.66,671.26 2492.13,671.26 2525.59,671.26 2559.06,671.26 2592.52,671.26 3198.82,683.07 3383.86,692.91 37.4,694.88 1767.72,698.82 2025.59,702.76 2169.29,702.76 3143.7,702.76 2358.27,704.72 2391.73,704.72 2425.2,704.72 2458.66,704.72 2492.13,704.72 2525.59,704.72 2559.06,704.72 2592.52,704.72 1405.51,706.69 1248.03,712.6 1828.74,716.54 2084.65,718.5 1594.49,720.47 429.13,728.35 2358.27,738.19 2391.73,738.19 2425.2,738.19 2458.66,738.19 2492.13,738.19 2525.59,738.19 2559.06,738.19 2592.52,738.19 3714.57,746.06 1903.54,753.94 1649.61,759.84 2169.29,761.81 1744.09,765.75 2027.56,771.65 2358.27,771.65 2391.73,771.65 2425.2,771.65 2458.66,771.65 2492.13,771.65 2525.59,771.65 2559.06,771.65 2592.52,771.65 3255.91,771.65 1372.05,773.62 2084.65,777.56 1480.32,783.46 561.02,787.4 732.28,799.21 2358.27,805.12 2391.73,805.12 2425.2,805.12 2458.66,805.12 2492.13,805.12 2525.59,805.12 2559.06,805.12 2592.52,805.12 3318.9,805.12 885.83,807.09 1267.72,807.09 3716.54,818.9 1866.14,824.8 3175.2,824.8 2114.17,832.68 45.28,836.61 2358.27,838.58 2391.73,838.58 2425.2,838.58 2458.66,838.58 2492.13,838.58 2525.59,838.58 2559.06,838.58 2592.52,838.58 1736.22,864.17 3251.97,866.14 -175.2,868.11 561.02,870.08 1330.71,870.08 962.6,872.05 2358.27,872.05 2391.73,872.05 2425.2,872.05 2458.66,872.05 2492.13,872.05 2525.59,872.05 2559.06,872.05 2592.52,872.05 846.46,874.02 1234.25,874.02 3165.35,885.83 2358.27,905.51 2391.73,905.51 2425.2,905.51 2458.66,905.51 2492.13,905.51 2525.59,905.51 2559.06,905.51 2592.52,905.51 1866.14,909.45 1612.2,913.39 1785.43,913.39 2110.24,917.32 1956.69,923.23 3714.57,931.1 643.7,944.88 868.11,944.88 2212.6,950.79 561.02,954.72 1992.13,954.72 2645.67,964.57 974.41,968.5 1866.14,968.5 2080.71,974.41 1334.65,976.38 3592.52,990.16 2712.6,992.13 974.41,996.06 2267.72,998.03 3096.46,1007.87 2057.09,1009.84 1972.44,1013.78 2212.6,1017.72 41.34,1021.65 887.8,1021.65 3096.46,1023.62 3165.35,1023.62 1866.14,1031.5 1785.43,1037.4 2651.57,1043.31 2299.21,1047.24 913.39,1061.02 561.02,1062.99 3545.28,1066.93 427.17,1070.87 -175.2,1074.8 2033.46,1074.8 1978.35,1076.77 1124.02,1078.74 299.21,1084.65 3450.79,1086.61 1866.14,1094.49 2624.02,1094.49 1793.31,1102.36 1685.04,1106.3 1738.19,1112.2 1933.07,1114.17 3714.57,1116.14 3157.48,1120.08 562.99,1131.89 1316.93,1135.83 2712.6,1135.83 3311.02,1139.76 2622.05,1151.57 3663.39,1151.57 3529.53,1153.54 1736.22,1157.48 1933.07,1173.23 2580.71,1177.17 1267.72,1185.04 1338.58,1185.04 1866.14,1185.04 1799.21,1190.94 2816.93,1196.85 1531.5,1200.79 2618.11,1210.63 429.13,1212.6 3165.35,1212.6 312.99,1216.54 2375.98,1220.47 2212.6,1222.44 2893.7,1230.32 3307.09,1240.16 3438.98,1242.13 1868.11,1244.09 45.28,1275.59 -175.2,1281.5 1608.27,1281.5 1881.89,1281.5 1385.83,1287.4 854.33,1289.37 3360.24,1295.28 3714.57,1301.18 1287.4,1303.15 1360.24,1303.15 1484.25,1309.06 3562.99,1309.06 3165.35,1330.71 1665.35,1332.68 1513.78,1336.61 3204.72,1338.58 2763.78,1344.49 3165.35,1346.46 513.78,1358.27 1702.76,1374.02 1555.12,1375.98 2850.39,1393.7 2937.01,1397.64 651.57,1405.51 570.87,1411.42 3072.83,1435.04 2753.94,1452.76 3360.24,1458.66 2824.8,1462.6 498.03,1464.57 314.96,1470.47 2942.91,1472.44 3564.96,1478.35 3714.57,1486.22 -175.2,1488.19 3377.95,1503.94 3220.47,1507.87 498.03,1537.4 3171.26,1561.02 3267.72,1561.02 3035.43,1570.87 442.91,1574.8 1072.83,1574.8 1185.04,1574.8 1244.09,1574.8 1305.12,1574.8 3564.96,1588.58 2769.69,1594.49 590.55,1612.2 2858.27,1616.14 2917.32,1616.14 2212.6,1618.11 2458.66,1618.11 2622.05,1618.11 2805.12,1622.05 1192.91,1631.89 2698.82,1633.86 1488.19,1639.76 1251.97,1649.61 1618.11,1651.57 1303.15,1653.54 1419.29,1657.48 2212.6,1657.48 2799.21,1661.42 2858.27,1661.42 3316.93,1663.39 448.82,1667.32 2334.65,1667.32 3714.57,1671.26 590.55,1673.23 1072.83,1675.2 1131.89,1679.13 1675.2,1683.07 2917.32,1687.01 2976.38,1687.01 2751.97,1688.98 3035.43,1692.91 -175.2,1694.88 2543.31,1698.82 1537.4,1706.69 692.91,1710.63 3257.87,1710.63 1383.86,1712.6 1192.91,1718.5 2614.17,1718.5 2785.43,1718.5 1074.8,1720.47 1125.98,1720.47 2246.06,1724.41 1446.85,1736.22 2437.01,1736.22 2344.49,1742.13 3320.87,1744.09 3375.98,1750 1316.93,1751.97 2584.65,1755.91 3417.32,1757.87 1238.19,1761.81 1616.14,1763.78 1675.2,1763.78 3104.33,1763.78 3179.13,1763.78 3564.96,1763.78 519.69,1793.31 2395.67,1805.12 2692.91,1805.12 1470.47,1807.09 1529.53,1807.09 1588.58,1807.09 2336.61,1807.09 2456.69,1807.09 2513.78,1807.09 2574.8,1807.09 2633.86,1807.09 3248.03,1814.96 3311.02,1814.96 458.66,1840.55 3714.57,1856.3 1409.45,1893.7 -175.2,1901.57 3559.06,1901.57 2261.81,1907.48 2842.52,1907.48 3251.97,1907.48 415.35,1909.45 3301.18,1917.32 2986.22,1921.26 3045.28,1927.17 533.46,1929.13 3165.35,1940.94 2535.43,1942.91 2594.49,1942.91 2212.6,1946.85 478.35,1952.76 1129.92,1956.69 2438.98,1956.69 1344.49,1958.66 1543.31,1958.66 1417.32,1960.63 1606.3,1960.63 2864.17,1960.63 2352.36,1962.6 2253.94,1968.5 1482.28,1974.41 2027.56,1974.41 1645.67,1980.32 1330.71,1992.13 2500,1992.13 2559.06,1992.13 2618.11,1992.13 3228.35,1992.13 602.36,2000 1397.64,2001.97 1590.55,2003.94 2732.28,2005.91 1147.64,2009.84 1192.91,2009.84 1240.16,2009.84 3131.89,2009.84 2356.3,2017.72 1645.67,2023.62 1706.69,2023.62 2405.51,2023.62 1933.07,2027.56 2000,2027.56 1094.49,2035.43 3714.57,2041.34 3021.65,2043.31 1590.55,2047.24 2500,2049.21 2557.09,2049.21 2618.11,2051.18 990.16,2055.12 2730.32,2055.12 3330.71,2055.12 3023.62,2061.02 1992.13,2066.93 2041.34,2066.93 2419.29,2066.93 537.4,2068.9 1929.13,2074.8 2102.36,2074.8 2151.57,2074.8 2210.63,2074.8 1253.94,2084.65 2305.12,2086.61 1736.22,2090.55 1622.05,2098.43 1992.13,2102.36 2041.34,2102.36 2259.84,2102.36 -175.2,2108.27 350.39,2112.2 2440.94,2116.14 2500,2116.14 2559.06,2116.14 2618.11,2116.14 486.22,2118.11 555.12,2122.05 604.33,2124.02 1935.04,2135.83 2685.04,2137.8 730.32,2145.67 2730.32,2147.64 318.9,2153.54 3629.92,2161.42 1789.37,2167.32 696.85,2177.17 1212.6,2179.13 2730.32,2179.13 1553.15,2183.07 1710.63,2185.04 507.87,2187.01 1165.35,2194.88 1125.98,2200.79 198.82,2212.6 753.94,2212.6 452.76,2216.54 564.96,2218.5 620.08,2224.41 3714.57,2226.38 -175.2,2228.35 1218.5,2238.19 1913.39,2242.13 2435.04,2246.06 322.83,2248.03 2360.24,2255.91 1149.61,2269.69 3486.22,2287.4 2271.65,2311.02 1696.85,2314.96 2559.06,2314.96 2677.17,2314.96 3080.71,2318.9 1931.1,2324.8 324.8,2332.68 1206.69,2334.65 2265.75,2338.58 1330.71,2354.33 2043.31,2354.33 2208.66,2354.33 1988.19,2358.27 78.74,2360.24 1513.78,2364.17 1279.53,2372.05 1098.43,2377.95 1375.98,2383.86 3013.78,2385.83 1555.12,2401.57 1988.19,2401.57 2228.35,2401.57 2062.99,2403.54 3714.57,2411.42 425.2,2421.26 3568.9,2454.72 133.86,2464.57 3673.23,2468.5 3265.75,2488.19 131.89,2509.84 3096.46,2509.84 1124.02,2580.71 2375.98,2580.71 2562.99,2590.55 3714.57,2596.46 -175.2,2637.8 297.24,2637.8 3557.09,2639.76 3080.71,2643.7 3019.69,2645.67 1348.43,2677.17 3427.17,2679.13 1458.66,2681.1 3017.72,2687.01 3080.71,2688.98 2185.04,2702.76 1940.94,2706.69 2438.98,2708.66 2086.61,2736.22 -175.2,2738.19 43.31,2751.97 3655.51,2753.94 3025.59,2763.78 35.43,2771.65 198.82,2771.65 1409.45,2773.62 -125.98,2781.5 3714.57,2781.5 1269.69,2783.46 37.4,2791.34 2519.69,2797.24 2444.88,2799.21 2840.55,2801.18 1102.36,2807.09 3250,2811.02 -124.02,2816.93 -175.2,2820.87 1592.52,2822.83 1899.61,2822.83 2629.92,2826.77 2750,2826.77 1433.07,2830.71 2214.57,2860.24 3423.23,2866.14 3561.02,2889.76 1793.31,2893.7 2057.09,2897.64 7.87,2905.51 2988.19,2905.51 2781.5,2907.48 326.77,2921.26 2330.71,2925.2 -151.57,2935.04 1098.43,2958.66 3714.57,2966.54 -100.39,2980.32 348.43,2982.28 112.2,2984.25 425.2,2988.19 549.21,2988.19 673.23,2988.19 797.24,2988.19 921.26,2988.19 1045.28,2988.19 1169.29,2988.19 1293.31,2988.19 1417.32,2988.19 1541.34,2988.19 1665.35,2988.19 1789.37,2988.19 1913.39,2988.19 1980.32,2988.19 2037.4,2988.19 2161.42,2988.19 2285.43,2988.19 2409.45,2988.19 2533.46,2988.19 2657.48,2988.19 2781.5,2988.19 2905.51,2988.19 3029.53,2988.19 3153.54,2988.19 3277.56,2988.19 3401.57,2988.19 3525.59,2988.19 3649.61,2988.19
  other v2: 2478.35,348.43 2568.9,348.43 2657.48,348.43 3159.45,358.27 3234.25,358.27 3287.4,366.14 2478.35,377.95 2568.9,377.95 2657.48,377.95 3159.45,381.89 3234.25,381.89 3159.45,405.51 3234.25,405.51 3161.42,580.71 3307.09,580.71 3161.42,604.33 3307.09,606.3 2029.53,612.2 3192.91,618.11 3238.19,618.11 3273.62,618.11 3161.42,629.92 3307.09,631.89 3055.12,665.35 2958.66,797.24 2958.66,852.36 2978.35,852.36 2978.35,899.61 3009.84,899.61 2958.66,1124.02 2958.66,1179.13 2978.35,1179.13 2978.35,1226.38 3009.84,1226.38 639.76,1460.63 659.45,1460.63 679.13,1460.63 647.64,1785.43 667.32,1785.43 687.01,1785.43 328.74,1946.85 377.95,1954.72 2377.95,2255.91 19.69,2289.37 3149.61,2303.15 3251.97,2303.15 3271.65,2303.15 19.69,2309.06 1659.45,2322.83 1679.13,2322.83 3251.97,2322.83 3271.65,2322.83 2381.89,2360.24 2360.24,2381.89
GPIO01: CON1.29 U8.D1 | length 515.2
  Top w3.94: CON1.29@140.94,740.94 96.46,696.46 96.46,511.23 113.59,494.09 271.65,494.09 305.12,527.56 U8.D1@342.52,527.56
GPIO07: CON1.32 U5.B1 | length 1134.5
  Top w3.94: v1(293.31,1637.8) U5.B1@330.71,1637.8
  Bottom w3.94: CON1.32@240.94,640.94 194.88,687.01 194.88,1578.06 213.27,1596.46 282.17,1596.46 293.31,1607.59 v1(293.31,1637.8)
GPIO09: CON1.7 U8.A1 | length 1657.6
  Top w3.94: CON1.7@140.94,1840.94 92.52,1792.52 92.52,1409.45 108.27,1393.7 169.29,1393.7 187.01,1375.98 187.01,1307.09 171.26,1291.34 104.33,1291.34 84.65,1271.65 84.65,816.93 110.24,791.34 165.35,791.34 179.13,777.56 179.13,600.39 192.91,586.61 U8.A1@342.52,586.61
GPIO11: CON1.31 U8.C1 | length 403.8
  Top w3.94: CON1.31@140.94,640.94 104.33,604.33 104.33,514.49 116.85,501.97 267.72,501.97 312.99,547.24 U8.C1@342.52,547.24
GPIO12: CON1.15 U5.C1 | length 559
  Top w3.94: CON1.15@140.94,1440.94 100.39,1481.5 100.39,1671.26 114.17,1685.04 167.32,1685.04 183.07,1669.29 183.07,1612.2 194.88,1600.39 312.99,1600.39 U5.C1@330.71,1618.11
GPIO13: CON1.33 U8.B1 | length 222.1
  Top w3.94: CON1.33@140.94,540.94 178.74,578.74 330.71,578.74 U8.B1@342.52,566.93
GSENSOR_INT_L: U1.110 U4.D3 | length 2120.9
  Top w3.94: U4.D3@381.89,881.89 391.73,881.89 395.67,877.95 v1(399.61,877.95) ; v1(1557.09,901.57) 1547.24,911.42 1547.24,973.54 1594.49,1020.78 1594.49,1133.8 1824.86,1364.17 1869.04,1364.17 1951.72,1446.85 2041.96,1446.85 2084.24,1489.13 2084.24,1491.72 2091.54,1499.02 U1.110@2091.54,1527.56
  Bottom w3.94: v1(399.61,877.95) 417.32,895.67 1545.28,895.67 1551.18,901.57 v1(1557.09,901.57)
HDMI0_TX0N: R95214.2 U1.75 U90105.2 | length 369
  Top w3.94: U1.75@2436.02,1850.39 2436.02,1874.02 2431.1,1878.94 2431.1,1905.37 2488.33,1962.6 2581.83,1962.6 2593.5,1974.27 2593.5,1987.2 v1(2598.43,1992.13) ; U90105.2@2595.67,2084.65 R95214.2@2596.46,2084.65 2596.46,2070.87 v1(2600.39,2066.93)
  Bottom w3.94: v1(2598.43,1992.13) 2593.5,1997.05 2593.5,2062.99 2599.41,2066.93 v1(2600.39,2066.93)
HDMI0_TX0P: R95213.2 U1.77 U90105.1 | length 365.8
  Top w3.94: U1.77@2416.34,1850.39 2416.34,1872.05 2421.26,1876.97 2421.26,1909.45 2484.25,1972.44 2577.76,1972.44 2583.66,1978.35 2583.66,1987.2 v1(2578.74,1992.13) ; v1(2576.77,2066.93) U90105.1@2576.77,2084.65
  Bottom w3.94: v1(2576.77,2066.93) 2577.76,2066.93 2583.66,2061.02 2583.66,1997.05 v1(2578.74,1992.13)
HDMI0_TX1N: R95212.2 U1.69 U90104.2 | length 332.9
  Top w3.94: U1.69@2495.08,1850.39 2495.08,1878.94 2490.16,1883.86 2490.16,1897.5 2506.05,1913.39 2561.02,1913.39 2570.87,1923.23 2570.87,1938.98 v1(2574.8,1942.91) ; U90104.2@2538.58,2084.65 R95212.2@2539.37,2084.65 v1(2539.37,2064.96)
  Bottom w3.94: v1(2539.37,2064.96) 2534.45,2060.04 2534.45,1979.33 2541.34,1972.44 2558.07,1972.44 2570.87,1959.65 2570.87,1946.85 v1(2574.8,1942.91)
HDMI0_TX1P: R95211.2 U1.71 U90104.1 | length 333.7
  Top w3.94: U1.71@2475.39,1850.39 2475.39,1878.94 2480.32,1883.86 2480.32,1901.57 2501.97,1923.23 2556.95,1923.23 2561.02,1927.31 2561.02,1937.01 v1(2555.12,1942.91) ; v1(2519.69,2064.96) U90104.1@2519.69,2084.65
  Bottom w3.94: v1(2519.69,2064.96) 2519.69,2063.98 2524.61,2059.06 2524.61,1975.25 2537.26,1962.6 2553.99,1962.6 2561.02,1955.57 2561.02,1948.82 v1(2555.12,1942.91)
HDMI0_TX2N: R95210.2 U1.63 U4106.2 | length 270.8
  Top w3.94: U4106.2@2479.53,2084.65 R95210.2@2480.32,2084.65 v1(2480.32,2064.96) ; v1(2553.15,1893.7) 2553.15,1850.39 U1.63@2554.13,1850.39
  Bottom w3.94: v1(2480.32,2064.96) 2479.33,2064.96 2475.39,2061.02 2475.39,1981.3 2548.23,1908.46 2548.23,1898.62 v1(2553.15,1893.7)